# Altium PCB PCB.pcbdoc
Units mil, origin at the board's own origin, x right, y up, seen from the top; angles counter-clockwise.
Board outline 1752.85 x 1681.1 mil, 2 copper layers (Top Layer, Bottom Layer); 13 components, 5 nets, 30 pads, 10 vias.
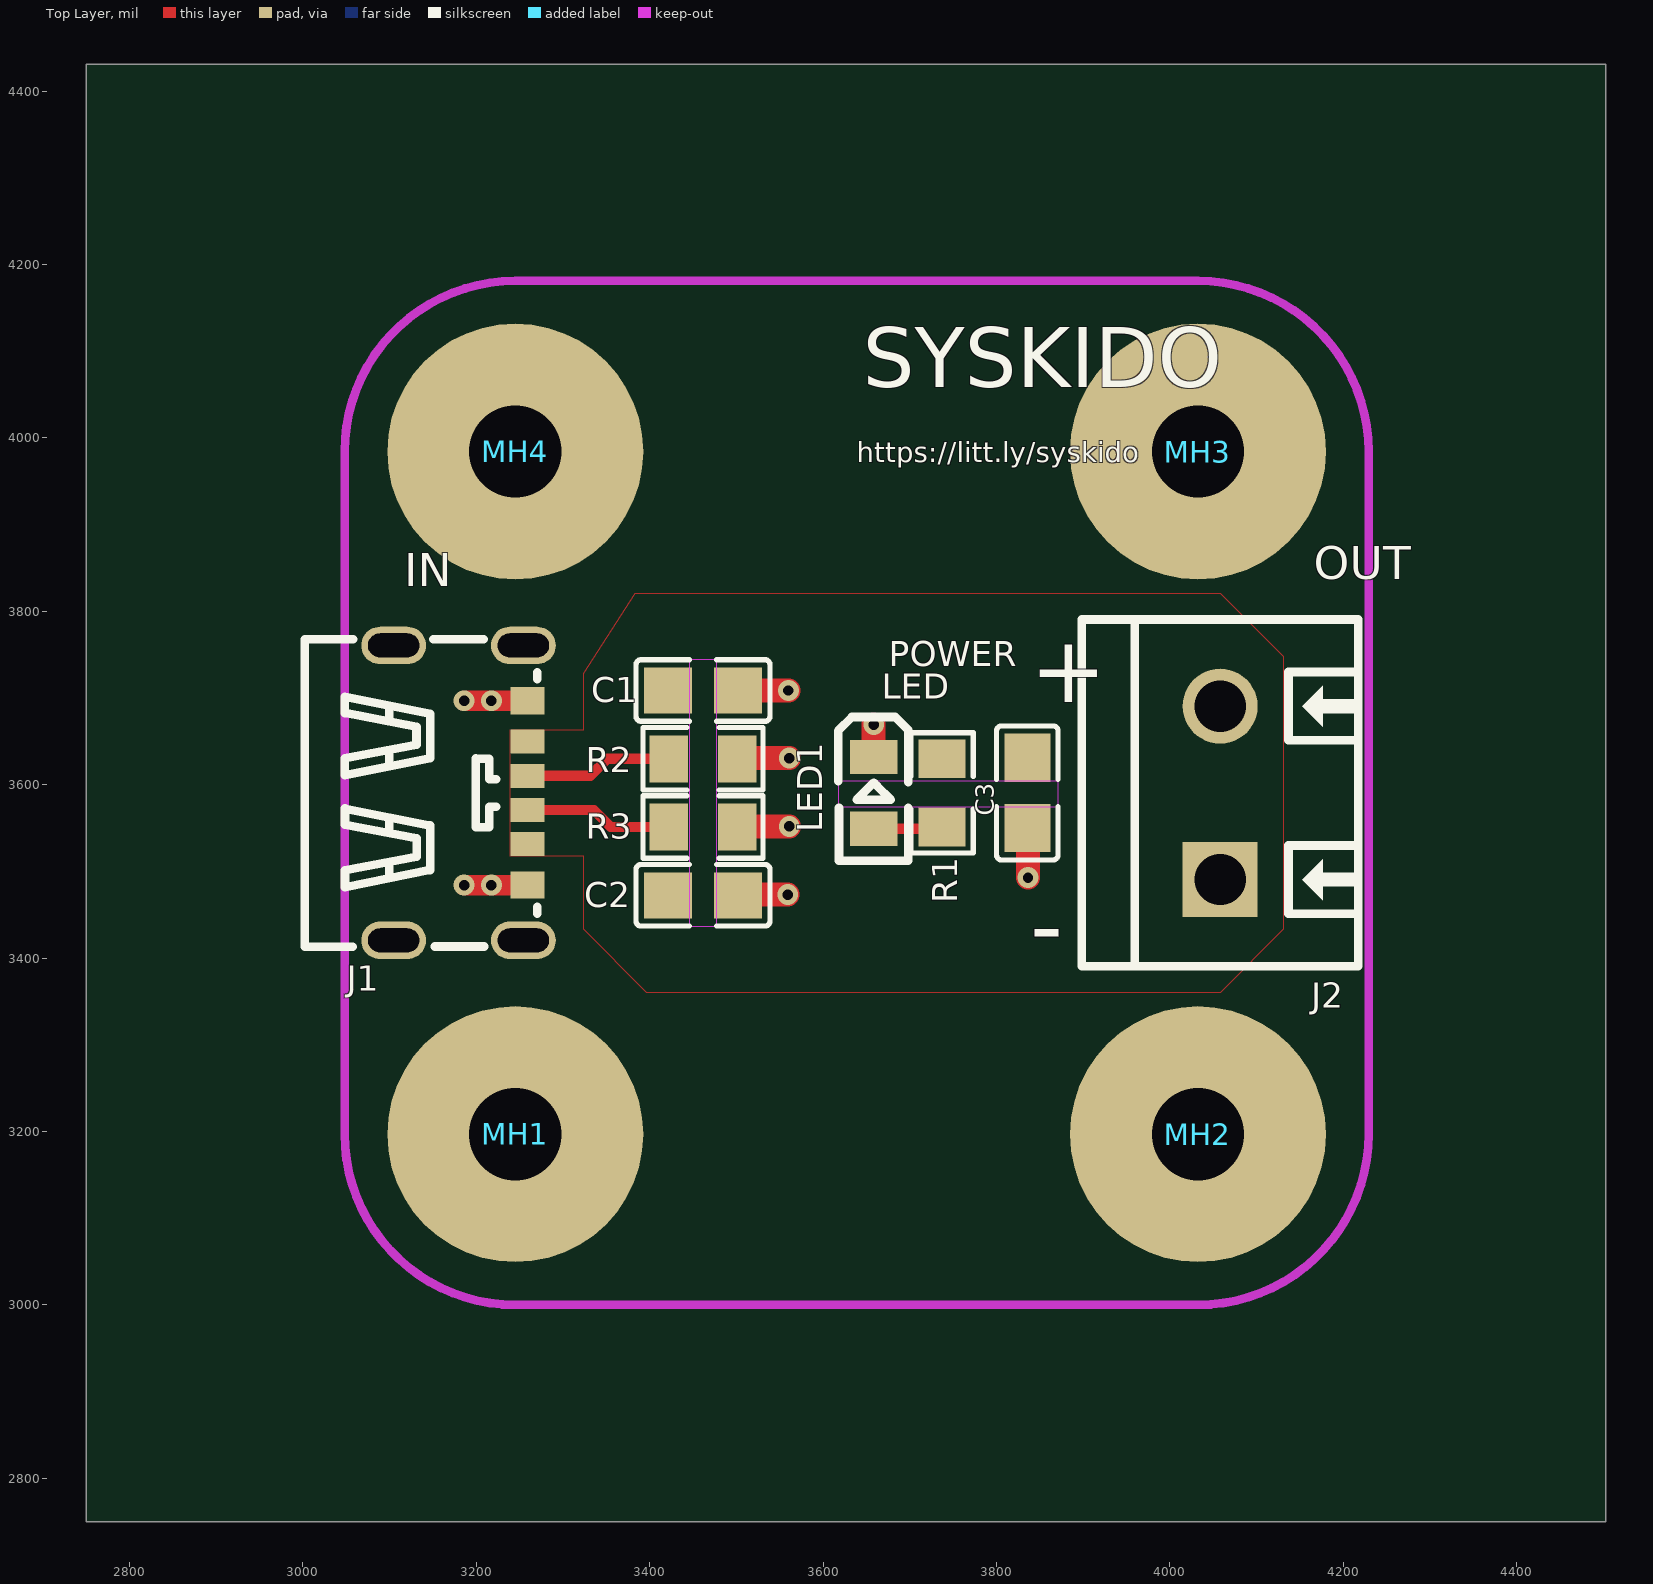
[diagram p0: Top Layer view]
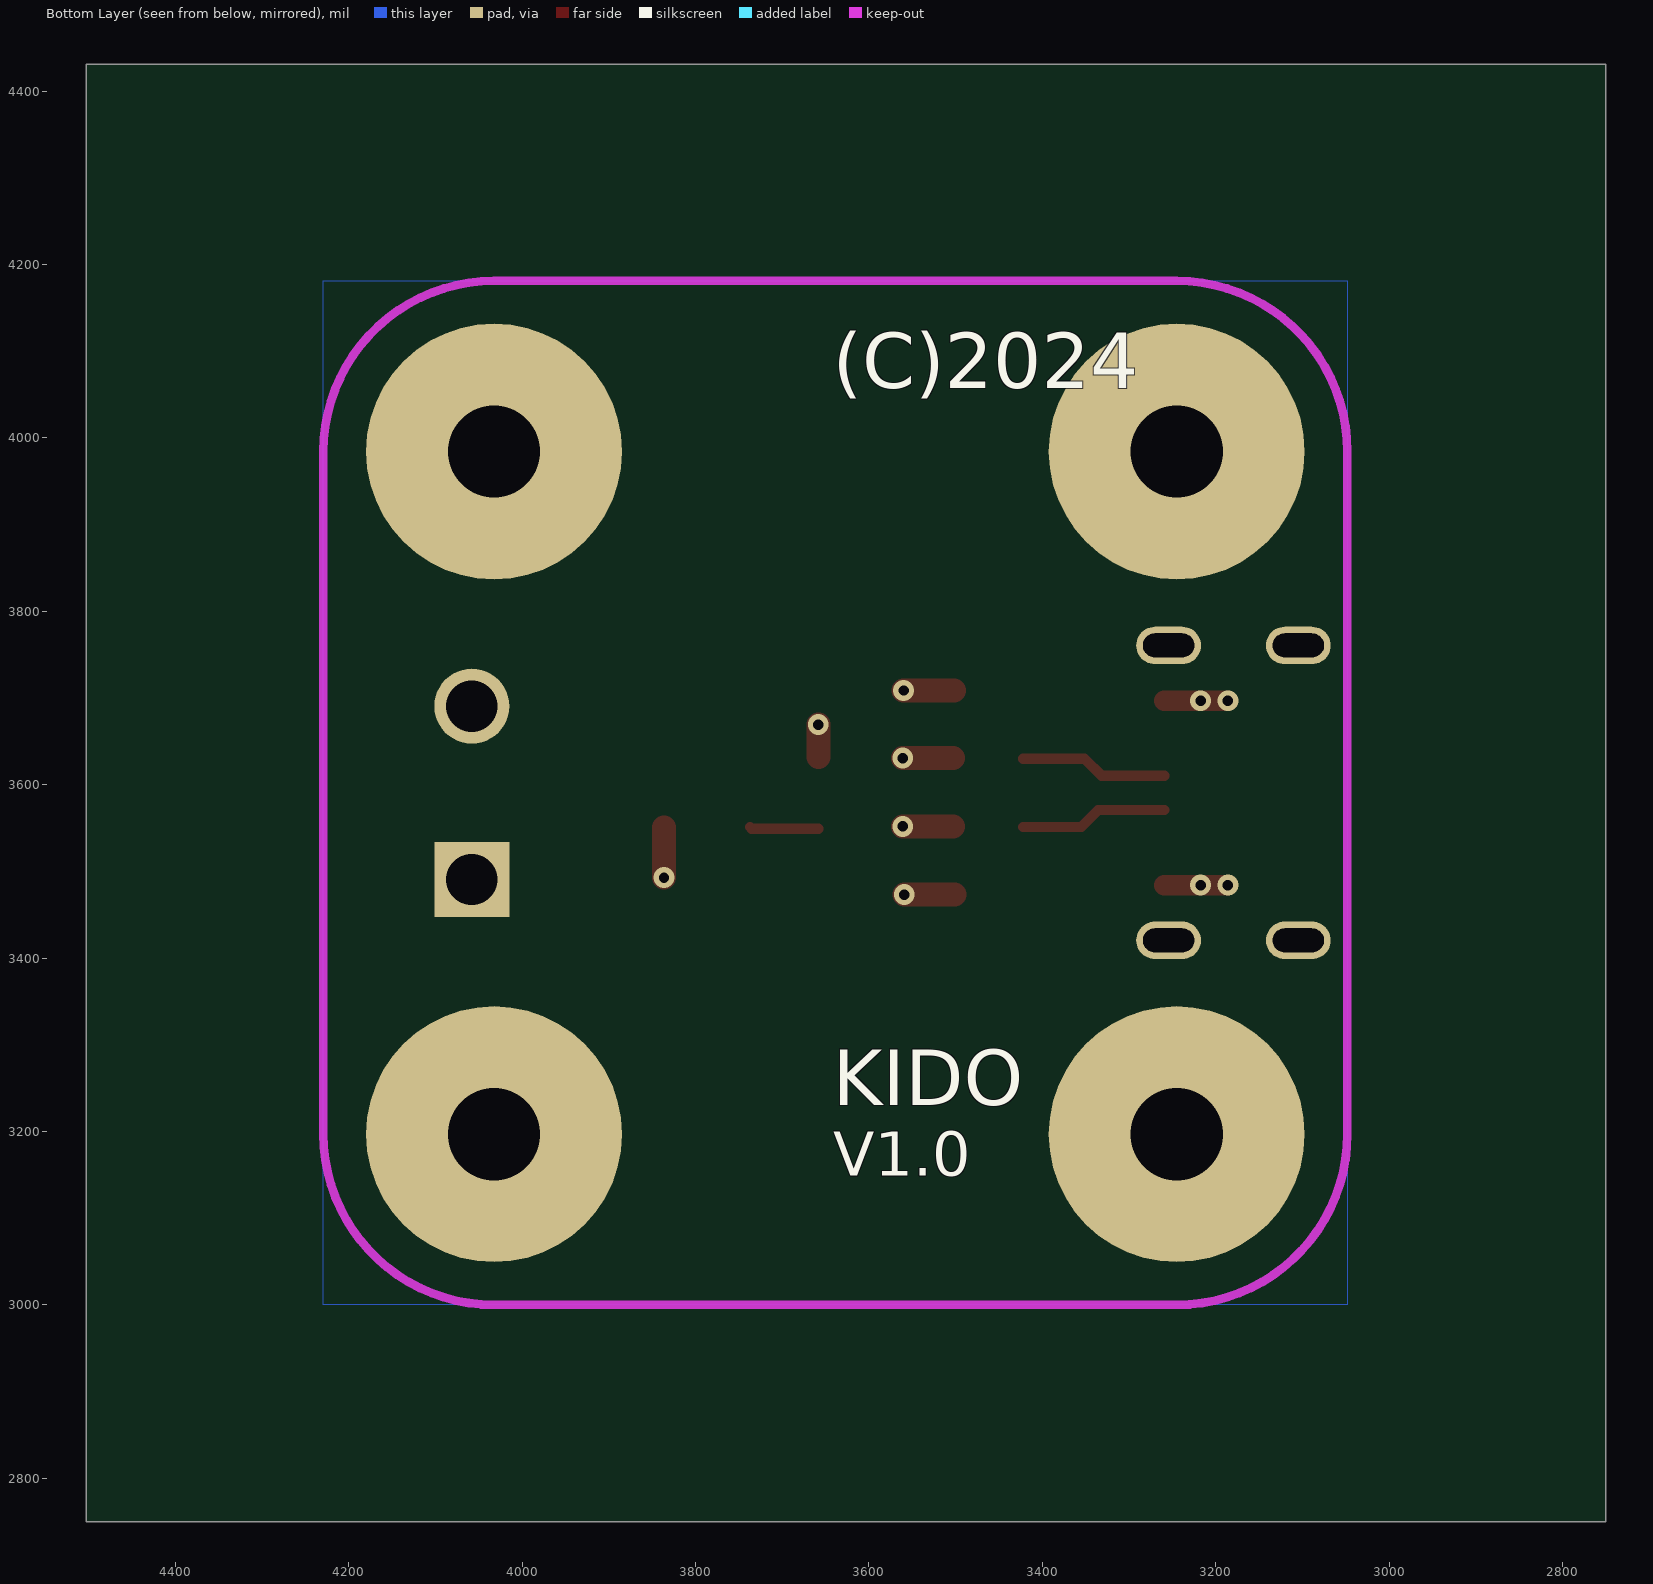
[diagram p1: Bottom Layer view, seen from below]

## Layer stack, top to bottom
Top Solder Mask Layer: solder mask 0.4, Solder Resist, Dk 3.5
Top Layer: signal copper 1.4
Dielectric1: dielectric 12.6, FR-4, Dk 4.8
Bottom Layer: signal copper 1.4
Bottom Solder Mask Layer: solder mask 0.4, Solder Resist, Dk 3.5

## Board outline
4502.85,2750 2750,2750 2750,4431.1 4502.85,4431.1

## Design rules (kind name [scope] priority, off if disabled: settings)
Clearance [All] p1: gap=10 ignorepadtopadclearanceinfootprint=FALSE
PolygonConnect [All] p1: connectstyle=Relief reliefconductorwidth=10 reliefentries=4 polygonreliefangle="90 Angle" airgapwidth=10
RoutingVias [All] p1: holewidth=28 width=50 viastyle="Through Hole" minholewidth=28 minwidth=50 maxholewidth=28 maxwidth=50
SolderMaskExpansion [All] p1: expansion=4 istentingtop=FALSE
Width [All] p1: maxlimit=10 minlimit=10 preferedwidth=10
30 further rules are at their usual default settings.

## Components (designator, comment, footprint, x,y, rotation, side; value= is the part's Value field where it differs from the comment)
C1 "CC0805KRX7R9BB104" C0805 3461.51,3708.66 r180 top
C2 "CC0805KRX7R9BB104" C0805 3461.51,3472.44 r180 top
C3 "CC0805KRX7R9BB104" C0805 3835.53,3590.55 r90 top
J1 "TYPE-C 6P(073)" TYPE-C-SMD_TYPE-C-6P 3181.99,3590.55 r270 top
J2 "MKDSN 1,5/ 2-5,08" CONN-TH_2P-P5.08_1729128 4057.97,3590.55 r90 top
LED1 "KT-0805G" LED0805-R-RD 3658.36,3590.55 r270 top
MH1 "MH_7.5x2.7MM" MH_7.5X2.7MM 3244.98,3196.85 r0 top
MH2 "MH_7.5x2.7MM" MH_7.5X2.7MM 4032.38,3196.85 r0 top
MH3 "MH_7.5x2.7MM" MH_7.5X2.7MM 4032.38,3984.25 r0 top
MH4 "MH_7.5x2.7MM" MH_7.5X2.7MM 3244.98,3984.25 r0 top
R1 "0805W8F1001T5E" R0805 3737.1,3590.55 r90 top
R2 "0805W8F5101T5E" R0805 3461.51,3629.92 r180 top
R3 "0805W8F5101T5E" R0805 3461.51,3551.18 r180 top

## Footprints (in the part's own frame and the unit in brackets; to place one, negate y for a bottom-side part, rotate by r counter-clockwise, add the part's x,y. Pads: shape width x height; smd on the part's side, far side on the other; paste and mask are expansions set on the pad)
C0805 [mm]
  rect 1.41x1.35 smd paste-100 mask+0.051: 1(-1.03,0) 2(1.03,0)
  silkscreen extent -1.96,-0.9 1.96,0.9
CONN-TH_2P-P5.08_1729128 [mm]
  rect 2.2x2.2 hole 1.5 paste-2539.97 mask+0.051: 1(-2.54,0)
  round 2.2 hole 1.5 paste-2539.97 mask+0.051: 2(2.54,0)
  silkscreen extent -5.08,-4.05 5.08,4.05
LED0805-R-RD [mm]
  rect 1x1.4 smd paste+0 mask+0.051: 1(1.05,0) 2(-1.05,0)
  silkscreen extent -2.22,-1.04 1.99,1.01
MH_7.5X2.7MM [mm]
  round 7.5 hole 2.7: 1(0,0)
R0805 [mm]
  rect 1.133x1.377 smd paste-100 mask+0.051: 1(-1,0) 2(1,0)
  silkscreen extent -1.76,-0.92 1.76,0.92
TYPE-C-SMD_TYPE-C-6P [mm]
  oval 1.1x1.9 hole 0.7 slot 1.5 at 90 deg: 7(-4.32,-1.963) 7(-4.32,1.838) 7(4.32,-1.963) 7(4.32,1.838)
  rect 0.7x1 smd paste-100 mask+0.051: A5(-0.5,1.963) A9(1.5,1.963) B5(0.5,1.963) B9(-1.5,1.963)
  rect 0.8x1 smd paste-100 mask+0.051: A12(2.7,1.963) B12(-2.7,1.963)
  silkscreen extent -4.5,-4.56 4.5,2.24

## Via types
v1: diameter 24.02, hole 12.01, Top Layer to Bottom Layer, 10 vias

## Nets (pads, with @x,y where several pads share a name; then routed paths per layer and width w, separated by ;. In a path a pad name is that pad's centre, name@x,y a point inside that pad or via, vN(x,y) a via of type N, cw(c..) or ccw(c..) an arc to the next point about the centre after c; other vN are vias at no path point)
+5V: C1.2 C2.2 C3.2 J1.A9 J1.B9 J2.1 J2.2 LED1.2 R1.2 | length 37.4
  Top Layer w27.56: LED1.2 3658.36,3669.29
CC1: J1.B5 R3.2 | length 171
  Top Layer w11.81: J1.B5 3335.53,3570.87 3355.21,3551.18 R3.2
CC2: J1.A5 R2.2 | length 171
  Top Layer w11.81: J1.A5 3331.59,3610.24 3351.28,3629.92 R2.2
DIODE: LED1.1 R1.1 | length 79.6
  Top Layer w11.81: LED1.1 3735.12,3549.2 R1.1
GND: C3.1 J1.7 J1.A12 J1.B12 MH1.1 MH2.1 MH3.1 MH4.1 R2.1 R3.1 | length 320.3
  Top Layer w23.62: v1(3185.92,3484.26) 3220.82,3484.26 J1.A12 ; v1(3185.92,3696.85) 3220.82,3696.85 J1.B12
  Top Layer w27.56: R3.1@3503.05,3551.97 v1(3560.92,3551.97) ; R2.1@3503.05,3630.71 v1(3560.92,3630.71) ; v1(3836.32,3492.82) C3.1@3836.32,3550.69
  other v1: 3559.25,3473.23 3217.42,3484.26 3658.36,3669.29 3217.42,3696.85 3559.94,3708.66
pads on no net: C1.1 C2.1
copper on no net: | length 115.8
  Top Layer w27.56: 3501.37,3473.23 3559.25,3473.23 ; 3502.06,3708.66 3559.94,3708.66

## Polygon pours and split planes (outlines as drawn)
GND on Bottom Layer "Bottom Layer-GND" (solid, remove dead copper, pour order 0): 3048.13,3000 4229.23,3000 4229.23,4181.1 3048.13,4181.1
+5V on Top Layer "Top Layer-+5V" (solid, remove dead copper, pour order 1): 3323.72,3728.35 3383.52,3820.87 4057.97,3820.87 4130.8,3748.03 4130.8,3433.07 4057.97,3360.24 3396.55,3360.24 3323.72,3433.07 3323.72,3517.72 3239.07,3517.72 3239.07,3663.39 3323.72,3663.39

## Keep-outs
Top Layer:
  region: 3445.72,3436.87 3477.31,3436.87 3477.31,3744.24 3445.72,3744.24
  region: 3617.31,3574.76 3871.1,3574.76 3871.1,3604.1 3617.31,3604.1
Board Outline Layer:
  lines w10: 3048.13,3196.85 ccw(c3244.98,3196.85) 3244.98,3000 4032.38,3000 ccw(c4032.38,3196.85) 4229.23,3196.85 4229.23,3984.25 ccw(c4032.38,3984.25) 4032.38,4181.1 3244.98,4181.1 ccw(c3244.98,3984.25) 3048.13,3984.25 3048.13,3196.85

## Silkscreen, mask and mechanical layers (free items; w line width, h text height)
Top Silkscreen Layer:
  text "SYSKIDO" at 3645.81,4058.15 h68.99
  text "https://litt.ly/syskido" at 3638.68,3964.57 h39.37
  text "OUT" at 4166.04,3836.99 h38.33
  text "IN" at 3116.83,3829.11 h38.33
  text "POWER" at 3675.46,3736.37 h29.2
  text "LED" at 3667.59,3698.97 h29.2
  text "+" at 3839.17,3695.23 h77.21
  text "-" at 3839.17,3399.96 h77.21
Bottom Silkscreen Layer:
  text "(C)2024" at 3641.64,4057.05 h63.88
  text "KIDO" at 3641.64,3230.28 h63.88
  text "V1.0" at 3641.05,3148.79 h51.1